# Altium PCB acqboard.PcbDoc (part 2 of 5)
Units mil, origin at the board's own origin, x right, y up, seen from the top; angles counter-clockwise.
Board outline 7000 x 5250 mil, 4 copper layers (Top Layer, Internal Plane 1, Internal Plane 2, Bottom Layer); 629 components, 384 nets, 2086 pads, 785 vias.
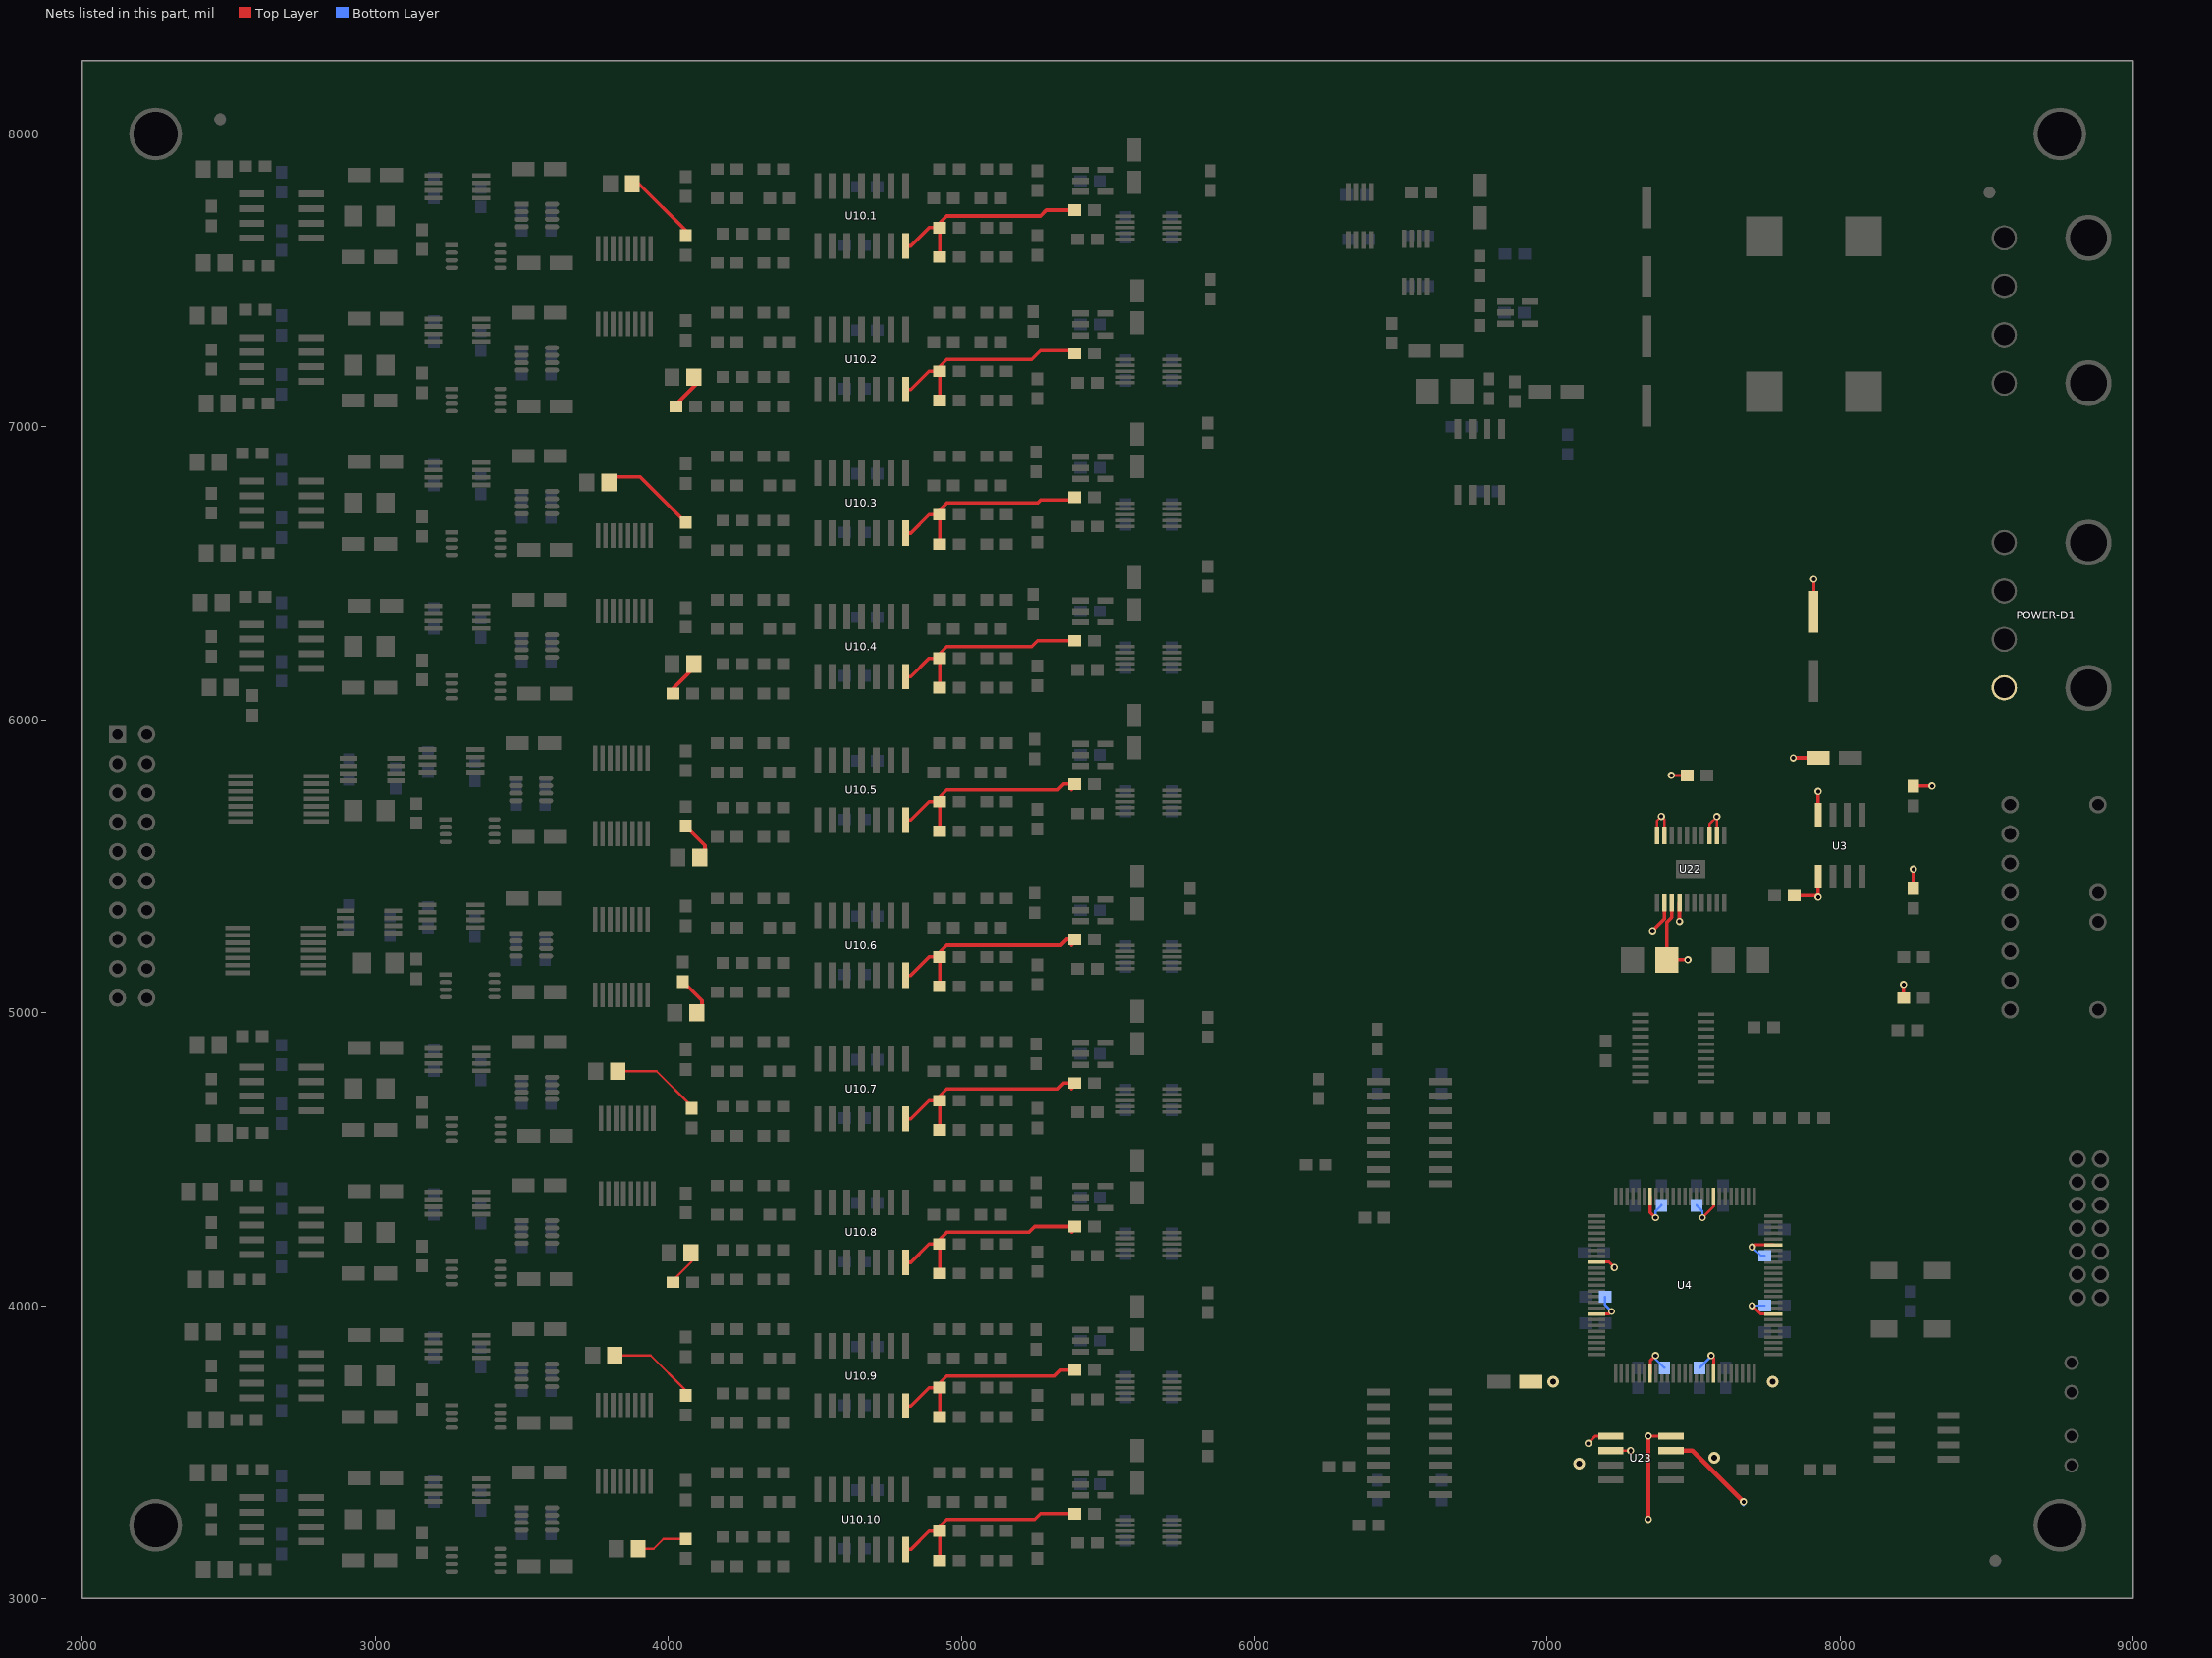
[diagram p4: the nets of this part, all layers, seen from the top]

## Components (designator, comment, footprint, x,y, rotation, side; value= is the part's Value field where it differs from the comment) (continued)
R50.8 "" 0603 2590,3100 r180 top (schematic designator R50)
U1.1 "AD8605RT" SOT-5 5450,7840 r0 top (schematic designator U1)
U1.2 "AD8605RT" SOT-5 5450,7350 r0 top (schematic designator U1)
U1.3 "AD8605RT" SOT-5 5450,6860 r0 top (schematic designator U1)
U1.4 "AD8605RT" SOT-5 5450,6370 r0 top (schematic designator U1)
U1.5 "AD8605RT" SOT-5 5450,5880 r0 top (schematic designator U1)
U1.6 "AD8605RT" SOT-5 5450,5350 r0 top (schematic designator U1)
U1.7 "AD8605RT" SOT-5 5450,4860 r0 top (schematic designator U1)
U1.8 "AD8605RT" SOT-5 5450,4370 r0 top (schematic designator U1)
U1.9 "AD8605RT" SOT-5 5450,3880 r0 top (schematic designator U1)
U1.10 "AD8605RT" SOT-5 5450,3390 r0 top (schematic designator U1)
U2.1 "AD7685BRM" "AD RM-10" 5640,7680 r270 top (schematic designator U2)
U2.2 "AD7685BRM" "AD RM-10" 5640,7190 r270 top (schematic designator U2)
U2.3 "AD7685BRM" "AD RM-10" 5640,6700 r270 top (schematic designator U2)
U2.4 "AD7685BRM" "AD RM-10" 5640,6210 r270 top (schematic designator U2)
U2.5 "AD7685BRM" "AD RM-10" 5640,5720 r270 top (schematic designator U2)
U2.6 "AD7685BRM" "AD RM-10" 5640,5190 r270 top (schematic designator U2)
U2.7 "AD7685BRM" "AD RM-10" 5640,4700 r270 top (schematic designator U2)
U2.8 "AD7685BRM" "AD RM-10" 5640,4210 r270 top (schematic designator U2)
U2.9 "AD7685BRM" "AD RM-10" 5640,3720 r270 top (schematic designator U2)
U2.10 "AD7685BRM" "AD RM-10" 5640,3230 r270 top (schematic designator U2)
U3 "SN75451BD" SO-G8/E2.5 8000,5570 r0 top
U4 "XC3S50-4VQ100C Spartan-3" F-QFP14X14-G100/N 7470,4070 r90 top
U5 "25LC320/SN" SO-G8/E2.9 8260,3550 r270 top
U6 "XCF01S" TSSO6x6-G20/X.3 7430,4880 r90 top
U7.1 "AD8510ARM" TSSO3X5-G8/X.4 3280,7820 r270 top (schematic designator U7)
U7.2 "AD8510ARM" TSSO3X5-G8/X.4 3280,7330 r270 top (schematic designator U7)
U7.3 "AD8510ARM" TSSO3X5-G8/X.4 3280,6840 r270 top (schematic designator U7)
U7.4 "AD8510ARM" TSSO3X5-G8/X.4 3280,6350 r270 top (schematic designator U7)
U7.5 "AD8510ARM" TSSO3X5-G8/X.4 3260,5860 r270 top (schematic designator U7)
U7.6 "AD8510ARM" TSSO3X5-G8/X.4 3260,5330 r270 top (schematic designator U7)
U7.7 "AD8510ARM" TSSO3X5-G8/X.4 3280,4840 r270 top (schematic designator U7)
U7.8 "AD8510ARM" TSSO3X5-G8/X.4 3280,4350 r270 top (schematic designator U7)
U7.9 "AD8510ARM" TSSO3X5-G8/X.4 3280,3860 r270 top (schematic designator U7)
U7.10 "AD8510ARM" TSSO3X5-G8/X.4 3280,3370 r270 top (schematic designator U7)
U8.1 "LTC6910-1" TSOT-23-8 3500,7760 r0 top (schematic designator U8)
U8.2 "LTC6910-1" TSOT-23-8 3500,7270 r0 top (schematic designator U8)
U8.3 "LTC6910-1" TSOT-23-8 3500,6780 r0 top (schematic designator U8)
U8.4 "LTC6910-1" TSOT-23-8 3500,6290 r0 top (schematic designator U8)
U8.5 "LTC6910-1" TSOT-23-8 3480,5800 r0 top (schematic designator U8)
U8.6 "LTC6910-1" TSOT-23-8 3480,5270 r0 top (schematic designator U8)
U8.7 "LTC6910-1" TSOT-23-8 3500,4780 r0 top (schematic designator U8)
U8.8 "LTC6910-1" TSOT-23-8 3500,4290 r0 top (schematic designator U8)
U8.9 "LTC6910-1" TSOT-23-8 3500,3800 r0 top (schematic designator U8)
U8.10 "LTC6910-1" TSOT-23-8 3500,3310 r0 top (schematic designator U8)
U9.1 "ADG619BRM" MSOP8 3260,7620 r0 top (schematic designator U9)
U9.2 "ADG619BRM" MSOP8 3260,7130 r0 top (schematic designator U9)
U9.3 "ADG619BRM" MSOP8 3260,6640 r0 top (schematic designator U9)
U9.4 "ADG619BRM" MSOP8 3260,6150 r0 top (schematic designator U9)
U9.5 "ADG619BRM" MSOP8 3240,5660 r0 top (schematic designator U9)
U9.6 "ADG619BRM" MSOP8 3240,5130 r0 top (schematic designator U9)
U9.7 "ADG619BRM" MSOP8 3260,4640 r0 top (schematic designator U9)
U9.8 "ADG619BRM" MSOP8 3260,4150 r0 top (schematic designator U9)
U9.9 "ADG619BRM" MSOP8 3260,3660 r0 top (schematic designator U9)
U9.10 "ADG619BRM" MSOP8 3260,3170 r0 top (schematic designator U9)
U10.1 "AD8513 AR" SO-G14 4660,7720 r0 top (schematic designator U10)
U10.2 "AD8513 AR" SO-G14 4660,7230 r0 top (schematic designator U10)
U10.3 "AD8513 AR" SO-G14 4660,6740 r0 top (schematic designator U10)
U10.4 "AD8513 AR" SO-G14 4660,6250 r0 top (schematic designator U10)
U10.5 "AD8513 AR" SO-G14 4660,5760 r0 top (schematic designator U10)
U10.6 "AD8513 AR" SO-G14 4660,5230 r0 top (schematic designator U10)
U10.7 "AD8513 AR" SO-G14 4660,4740 r0 top (schematic designator U10)
U10.8 "AD8513 AR" SO-G14 4660,4250 r0 top (schematic designator U10)
U10.9 "AD8513 AR" SO-G14 4660,3760 r0 top (schematic designator U10)
U10.10 "AD8513 AR" SO-G14 4660,3270 r0 top (schematic designator U10)
u11 "ADG604YRU" SSO-G14/X.4 2670,5730 r90 top (schematic designator U11)
U12.1 "AD8221AR" SO-G8 2680,7720 r270 top (schematic designator U12)
U12.2 "AD8221AR" SO-G8 2680,7230 r270 top (schematic designator U12)
U12.3 "AD8221AR" SO-G8 2680,6740 r270 top (schematic designator U12)
U12.4 "AD8221AR" SO-G8 2680,6250 r270 top (schematic designator U12)
U12.5 "AD8221AR" SO-G8 2680,4740 r270 top (schematic designator U12)
U12.6 "AD8221AR" SO-G8 2680,4250 r270 top (schematic designator U12)
U12.7 "AD8221AR" SO-G8 2680,3760 r270 top (schematic designator U12)
U12.8 "AD8221AR" SO-G8 2680,3270 r270 top (schematic designator U12)
U13 "AD8605RT" SOT-5 6900,7390 r0 top
U14 "IL715-3" SO-G16/D10 6530,3530 r90 top
U15 "IL716-3" SO-G16/D10 6530,4590 r270 top
U16 "SN74LV595APWR" SSO-G16/X.4 3850,7480 r0 top
U17 "SN74LV595APWR" SSO-G16/X.4 3860,4510 r0 top
U18 "SN74LV595APWR" SSO-G16/X.4 3850,6500 r0 top
U19 "SN74LV595APWR" SSO-G16/X.4 3850,3530 r0 top
U20 "SN74LV595APWR" SSO-G16/X.4 3840,5740 r0 top
U21 "SN74LV595APWR" SSO-G16/X.4 3840,5190 r0 top
U22 "TPS70245PWP" "PWP POWERPAD -20" 7490,5490 r270 top
U23 "TPS77525D" SO-G8 7320,3480 r90 top
U24 "AD8510ARM" TSSO3X5-G8/X.4 2990,5830 r270 top
U25 "AD8510ARM" TSSO3X5-G8/X.4 2980,5310 r270 top
U26 "OP1177ARM" TSSO3X5-G8/X.4 6550,7560 r0 top
u27 "ADG604YRU" SSO-G14/X.4 2660,5213 r90 top
U28 "LM4140CCM-4.1" SO-G8/D5 6770,6880 r0 top
U29 "AD8510ARM" TSSO3X5-G8/X.4 6360,7720 r0 top

## Footprints (in the part's own frame and the unit in brackets; to place one, negate y for a bottom-side part, rotate by r counter-clockwise, add the part's x,y. Pads: shape width x height; smd on the part's side, far side on the other; paste and mask are expansions set on the pad)
0603 [mm] "Standard-sized 0603 Passive"
  rect 1.1x1 smd: 1(-0.85,0) 2(0.85,0)
  silkscreen extent -1.7,-0.4 -1.7,0.4
0805 [mm] "Standard-sized 0805 Passive"
  rect 1.3x1.5 smd: 1(-0.95,0) 2(0.95,0)
  silkscreen extent -1.9,-0.65 -1.9,0.65
1206 [mm] "Standard-sized 1206 Passive"
  rect 1.6x1.8 smd: 1(-1.4,0) 2(1.4,0)
  silkscreen extent -2.53,-0.65 -2.53,0.65
3216 [mm] "Standard-Sized 3216 Polarized Leadless Cap"
  rect 2x1.2 smd: 1(-1.4,0) 2(1.4,0)
  silkscreen extent -2.79,-0.9 1.7,0.9
3528 [mm] "Standard-Sized 3528 Polarized Leadless Cap"
  rect 2x2.2 smd: 1(-1.5,0) 2(1.5,0)
  silkscreen extent -2.79,-1.52 1.65,1.52
"AD RM-10" [mm] "Shrink Small Outline; 10 Leads; Body Width 3 mm; Pitch 0.5 mm"
  rect 0.3x1.6 smd: 1(-1,-2.05) 2(-0.5,-2.05) 3(0,-2.05) 4(0.5,-2.05) 5(1,-2.05) 6(1,2.05) 7(0.5,2.05) 8(0,2.05) 9(-0.5,2.05) 10(-1,2.05)
  silkscreen extent -1.82,-2.17 1.58,0.85
CC1608-0603 [mm] "Chip Capacitor; Body 1.6 x 0.8 mm (LxW typ)"
  rect 1.1x1 smd: 1(-0.85,0) 2(0.85,0)
  silkscreen extent -1.7,-0.4 -1.7,0.4
F-QFP14X14-G100/N [mm]
  rect 1.55x0.3 smd: 1(-7.675,6) 2(-7.675,5.5) 3(-7.675,5) 4(-7.675,4.5) 5(-7.675,4) 6(-7.675,3.5) 7(-7.675,3) 8(-7.675,2.5) 9(-7.675,2) 10(-7.675,1.5) 11(-7.675,1) 12(-7.675,0.5) 13(-7.675,0) 14(-7.675,-0.5) 15(-7.675,-1) 16(-7.675,-1.5) 17(-7.675,-2) 18(-7.675,-2.5) 19(-7.675,-3) 20(-7.675,-3.5) 21(-7.675,-4) 22(-7.675,-4.5) 23(-7.675,-5) 24(-7.675,-5.5) 25(-7.675,-6) 51(7.675,-6) 52(7.675,-5.5) 53(7.675,-5) 54(7.675,-4.5) 55(7.675,-4) 56(7.675,-3.5) 57(7.675,-3) 58(7.675,-2.5) 59(7.675,-2) 60(7.675,-1.5) 61(7.675,-1) 62(7.675,-0.5) 63(7.675,0) 64(7.675,0.5) 65(7.675,1) 66(7.675,1.5) 67(7.675,2) 68(7.675,2.5) 69(7.675,3) 70(7.675,3.5) 71(7.675,4) 72(7.675,4.5) 73(7.675,5) 74(7.675,5.5) 75(7.675,6)
  rect 0.3x1.55 smd: 26(-6,-7.675) 27(-5.5,-7.675) 28(-5,-7.675) 29(-4.5,-7.675) 30(-4,-7.675) 31(-3.5,-7.675) 32(-3,-7.675) 33(-2.5,-7.675) 34(-2,-7.675) 35(-1.5,-7.675) 36(-1,-7.675) 37(-0.5,-7.675) 38(0,-7.675) 39(0.5,-7.675) 40(1,-7.675) 41(1.5,-7.675) 42(2,-7.675) 43(2.5,-7.675) 44(3,-7.675) 45(3.5,-7.675) 46(4,-7.675) 47(4.5,-7.675) 48(5,-7.675) 49(5.5,-7.675) 50(6,-7.675) 76(6,7.675) 77(5.5,7.675) 78(5,7.675) 79(4.5,7.675) 80(4,7.675) 81(3.5,7.675) 82(3,7.675) 83(2.5,7.675) 84(2,7.675) 85(1.5,7.675) 86(1,7.675) 87(0.5,7.675) 88(0,7.675) 89(-0.5,7.675) 90(-1,7.675) 91(-1.5,7.675) 92(-2,7.675) 93(-2.5,7.675) 94(-3,7.675) 95(-3.5,7.675) 96(-4,7.675) 97(-4.5,7.675) 98(-5,7.675) 99(-5.5,7.675) 100(-6,7.675)
  silkscreen extent -7.8,-6.5 6.5,6.82
FIDUCIAL [mil] "Fiducial footprint as recommended by PCBpro"
  round 40 smd paste-20 mask+30: 0(0,0)
HDR2x7-2mm [mm]
  round 1.5 hole 1: 1(0,0) 2(-2,0) 3(0,2) 4(-2,2) 5(0,4) 6(-2,4) 7(0,6) 8(-2,6) 9(0,8) 10(-2,8) 11(0,10) 12(-2,10) 13(0,12) 14(-2,12)
  silkscreen extent -3.5,-1.5 1.5,13.5
HDR2X10 [mm]
  rect 1.5x1.5 hole 0.9: 1(0,0)
  round 1.5 hole 0.9: 2(0,2.54) 3(2.54,0) 4(2.54,2.54) 5(5.08,0) 6(5.08,2.54) 7(7.62,0) 8(7.62,2.54) 9(10.16,0) 10(10.16,2.54) 11(12.7,0) 12(12.7,2.54) 13(15.24,0) 14(15.24,2.54) 15(17.78,0) 16(17.78,2.54) 17(20.32,0) 18(20.32,2.54) 19(22.86,0) 20(22.86,2.54)
  silkscreen extent -1.27,-1.27 24.13,3.81
HPVL [mil]
  round 60 hole 40: 1(150,0) 2(50,0) 3(-50,0) 4(-150,0) 5(-150,-300) 8(150,-300)
  silkscreen extent -200,-370 200,100
"LUMEX DUAL RT-ANG LED" [mil] "Lumex Dual Right-angle LED holder for part SSF-LXH2100XX"
  round 50 hole 35: 1(-175.2,0) 2(-75,0) 3(75,0) 4(175.2,0)
  silkscreen extent -246,-217 246,150
MJ4RTHR [mm]
  round 4 hole 3.2: 0(-8.4,-7.3) 0(4.2,-7.3)
  round 2.2 hole 1.8: 1(4.2,0) 2(0,0) 3(-4.2,0) 4(-8.4,0)
  silkscreen extent -11.1,-14.2 6.9,-1.9
MSOP8 [mm]
  rect 1.04x0.38 smd: 1(0,0)
  oval 1.04x0.38 smd: 2(0,-0.65) 3(0,-1.3) 4(0,-1.95) 5(4.24,-1.95) 6(4.24,-1.3) 7(4.24,-0.65) 8(4.24,0)
  silkscreen extent 1.25,-2.28 2.99,0.33
PanasonicE [mm]
  rect 3.6x0.8 smd: 1(3,0) 2(-3,0)
  silkscreen extent -4.6,-4.1 4.6,4.2
"PWP POWERPAD -20" [mil]
  rect 60x15 smd: 1(-115,115) 2(-115,89.4) 3(-115,63.8) 4(-115,38.2) 5(-115,12.6) 6(-115,-13) 7(-115,-38.6) 8(-115,-64.2) 9(-115,-89.8) 10(-115,-115.4) 11(115,-115.4) 12(115,-89.8) 13(115,-64.2) 14(115,-38.6) 15(115,-13) 16(115,12.6) 17(115,38.2) 18(115,63.8) 19(115,89.4) 20(115,115)
  rect 62x101 smd paste+0 mask+0: P1(0,0)
  silkscreen extent -75,-140 75,140
SG636PCE [mm]
  rect 2.3x1.5 smd: 1(0,0) 4(0,-5.08) 5(4.6,-5.08) 8(4.6,0)
  silkscreen extent -1.96,-8.64 4.57,3.05
SO-G8 [mm]
  rect 0.6x2.2 smd: 1(-1.905,-2.6) 2(-0.635,-2.6) 3(0.635,-2.6) 4(1.905,-2.6) 5(1.905,2.6) 6(0.635,2.6) 7(-0.635,2.6) 8(-1.905,2.6)
  silkscreen extent -2.88,-2.72 2.5,1.1
SO-G8/D5 [mm] "Small Outline; 8 Leads; Body Width 3.9 mm; Pitch 1.27 mm"
  rect 0.6x1.7 smd: 1(-1.905,-2.85) 2(-0.635,-2.85) 3(0.635,-2.85) 4(1.905,-2.85) 5(1.905,2.85) 6(0.635,2.85) 7(-0.635,2.85) 8(-1.905,2.85)
  silkscreen extent -2.88,-2.97 2.5,1.6
SO-G8/E2.5 [mm]
  rect 0.6x2.05 smd: 1(-1.905,-2.675) 2(-0.635,-2.675) 3(0.635,-2.675) 4(1.905,-2.675) 5(1.905,2.675) 6(0.635,2.675) 7(-0.635,2.675) 8(-1.905,2.675)
  silkscreen extent -2.88,-2.8 2.5,1.25
SO-G8/E2.9 [mm]
  rect 0.6x1.85 smd: 1(-1.905,-2.775) 2(-0.635,-2.775) 3(0.635,-2.775) 4(1.905,-2.775) 5(1.905,2.775) 6(0.635,2.775) 7(-0.635,2.775) 8(-1.905,2.775)
  silkscreen extent -2.88,-2.9 2.5,1.45
SO-G14 [mm]
  rect 0.6x2.2 smd: 1(-3.81,-2.6) 2(-2.54,-2.6) 3(-1.27,-2.6) 4(0,-2.6) 5(1.27,-2.6) 6(2.54,-2.6) 7(3.81,-2.6) 8(3.81,2.6) 9(2.54,2.6) 10(1.27,2.6) 11(0,2.6) 12(-1.27,2.6) 13(-2.54,2.6) 14(-3.81,2.6)
  silkscreen extent -4.78,-2.72 4.38,1.1
SO-G16/D10 [mm]
  rect 0.6x2.05 smd: 1(-4.445,-2.675) 2(-3.175,-2.675) 3(-1.905,-2.675) 4(-0.635,-2.675) 5(0.635,-2.675) 6(1.905,-2.675) 7(3.175,-2.675) 8(4.445,-2.675) 9(4.445,2.675) 10(3.175,2.675) 11(1.905,2.675) 12(0.635,2.675) 13(-0.635,2.675) 14(-1.905,2.675) 15(-3.175,2.675) 16(-4.445,2.675)
  silkscreen extent -5.42,-2.8 5,1.25
SOT-5 [mm]
  rect 1.45x0.55 smd: 1(-1.075,0.95) 2(-1.075,0) 3(-1.075,-0.95) 4(1.075,-0.95) 5(1.075,0.95)
  silkscreen extent -1.57,-1.55 0.9,1.75
SSO-G14/X.4 [mm]
  rect 0.4x2.15 smd: 1(-1.95,-3.275) 2(-1.3,-3.275) 3(-0.65,-3.275) 4(0,-3.275) 5(0.65,-3.275) 6(1.3,-3.275) 7(1.95,-3.275) 8(1.95,3.275) 9(1.3,3.275) 10(0.65,3.275) 11(0,3.275) 12(-0.65,3.275) 13(-1.3,3.275) 14(-1.95,3.275)
  silkscreen extent -3.25,-3.4 3.25,1.8
SSO-G16/X.4 [mm]
  rect 0.4x2.15 smd: 1(-2.275,-3.275) 2(-1.625,-3.275) 3(-0.975,-3.275) 4(-0.325,-3.275) 5(0.325,-3.275) 6(0.975,-3.275) 7(1.625,-3.275) 8(2.275,-3.275) 9(2.275,3.275) 10(1.625,3.275) 11(0.975,3.275) 12(0.325,3.275) 13(-0.325,3.275) 14(-0.975,3.275) 15(-1.625,3.275) 16(-2.275,3.275)
  silkscreen extent -3.25,-3.4 3.25,1.8
STEWARD_1SR [mil]
  rect 124x136 smd: 1(-169,0) 2(169,0)
  silkscreen extent -263,-100 263,100
TSOT-23-8 [mm]
  rect 1.22x0.43 smd: 1(0,0)
  oval 1.22x0.43 smd: 2(0,-0.65) 3(0,-1.3) 4(0,-1.95) 5(2.62,-1.95) 6(2.62,-1.3) 7(2.62,-0.65) 8(2.62,0)
  silkscreen extent 0.9,-2.35 1.75,0.25
TSSO3X5-G8/X.4 [mm]
  rect 0.4x1.55 smd: 1(-0.975,-2.075) 2(-0.325,-2.075) 3(0.325,-2.075) 4(0.975,-2.075) 5(0.975,2.075) 6(0.325,2.075) 7(-0.325,2.075) 8(-0.975,2.075)
  silkscreen extent -1.85,-2.2 1.55,0.9
TSSO6x6-G20/X.3 [mm]
  rect 0.3x1.45 smd: 1(-2.925,-2.825) 2(-2.275,-2.825) 3(-1.625,-2.825) 4(-0.975,-2.825) 5(-0.325,-2.825) 6(0.325,-2.825) 7(0.975,-2.825) 8(1.625,-2.825) 9(2.275,-2.825) 10(2.925,-2.825) 11(2.925,2.825) 12(2.275,2.825) 13(1.625,2.825) 14(0.975,2.825) 15(0.325,2.825) 16(-0.325,2.825) 17(-0.975,2.825) 18(-1.625,2.825) 19(-2.275,2.825) 20(-2.925,2.825)
  silkscreen extent -3.75,-2.95 3.3,1.7

## Part data
C1.1 C1.2 C1.3 C1.4 C1.5 C1.6 C1.7 C1.8 C1.9 C1.10 C3.1 C3.2 C3.3 C3.4 C3.5 C3.6 C3.7 C3.8 C3.9 C3.10 C4.1 C4.2 C4.3 C4.4 C4.5 C4.6 C4.7 C4.8 C4.9 C4.10 C5.1 C5.2 C5.3 C5.4 C5.5 C5.6 C5.7 C5.8 C5.9 C5.10 C6 C8 C9 C10 C12 C13 C14 C15 C16 C17 C18 C19 C20 C21 C22 C23 C24 C25 C26 C27 C28.1 C28.2 C28.3 C28.4 C28.5 C28.6 C28.7 C28.8 C28.9 C28.10 C29.1 C29.2 C29.3 C29.4 C29.5 C29.6 C29.7 C29.8 C29.9 C29.10 C30.1 C30.2 C30.3 C30.4 C30.5 C30.6 C30.7 C30.8 C30.9 C30.10 C31.1 C31.2 C31.3 C31.4 C31.5 C31.6 C31.7 C31.8 C31.9 C31.10 C32.1 C32.2 C32.3 C32.4 C32.5 C32.6 C32.7 C32.8 C32.9 C32.10 C35.1 C35.2 C35.3 C35.4 C35.5 C35.6 C35.7 C35.8 C35.9 C35.10 C36.1 C36.2 C36.3 C36.4 C36.5 C36.6 C36.7 C36.8 C36.9 C36.10 C37.1 C37.2 C37.3 C37.4 C37.5 C37.6 C37.7 C37.8 C37.9 C37.10 C38.1 C38.2 C38.3 C38.4 C38.5 C38.6 C38.7 C38.8 C38.9 C38.10 C39.1 C39.2 C39.3 C39.4 C39.5 C39.6 C39.7 C39.8 C39.9 C39.10 C40.1 C40.2 C40.3 C40.4 C40.5 C40.6 C40.7 C40.8 C40.9 C40.10 C41.1 C41.2 C41.3 C41.4 C41.5 C41.6 C41.7 C41.8 C41.9 C41.10 C42.1 C42.2 C42.3 C42.4 C42.5 C42.6 C42.7 C42.8 C42.9 C42.10 C43.1 C43.2 C43.3 C43.4 C43.5 C43.6 C43.7 C43.8 C44.1 C44.2 C44.3 C44.4 C44.5 C44.6 C44.7 C44.8 C47 C48.1 C48.2 C48.3 C48.4 C48.5 C48.6 C48.7 C48.8 C48.9 C48.10 C49 C50 C51 C52 C53 C55 C56 C57 C58 C59 C65.1 C65.2 C65.3 C65.4 C65.5 C65.6 C65.7 C65.8 C66 C71.1 C71.2 C71.3 C71.4 C71.5 C71.6 C71.7 C71.8 C71.9 C71.10 C72.1 C72.2 C72.3 C72.4 C72.5 C72.6 C72.7 C72.8 C72.9 C72.10 C73.1 C73.2 C73.3 C73.4 C73.5 C73.6 C73.7 C73.8 C74 C75 C76 C77: library part Cap, "Capacitor"
C2.1 C2.2 C2.3 C2.4 C2.5 C2.6 C2.7 C2.8 C2.9 C2.10 C45.1 C45.2 C45.3 C45.4 C45.5 C45.6 C45.7 C45.8 C46.1 C46.2 C46.3 C46.4 C46.5 C46.6 C46.7 C46.8 C69 C70: library part "Cap Pol3", "Polarized Capacitor (Surface Mount)"
C7 C54 C63 C64 C67 C68: library part "Cap Pol1", "Polarized Capacitor (Radial)"
C11 C33.1 C33.2 C33.3 C33.4 C33.5 C33.6 C33.7 C33.8 C33.9 C33.10 C34.1 C34.2 C34.3 C34.4 C34.5 C34.6 C34.7 C34.8 C34.9 C34.10 C61 C62: library part Cap2, "Capacitor"
C60: "Capacitor"
FID1 FID2 FID3 FID4 FID5 FID6: "Fiducial"
JP1: "Header, 7-Pin, Dual row"
JP2: "Header, 10-Pin, Dual row, Right Angle"
L1: library part "DUAL LED", "DUAL LED"
L2 L3: library part Inductor, "Inductor"
O1: library part HFBR-1528, "Low-cost fiber transmitter"
O2: library part SG-636PCE, "Epson CMOS/TTL Oscillator"
O3: library part HFBR-2528, "Low-cost fiber receiver"
POWER-A1 POWER-D1: library part "Header 4", "Header, 4-Pin"
R1 R2 R3 R4 R5 R6 R7 R8 R9 R10 R11 R12 R13.1 R13.2 R13.3 R13.4 R13.5 R13.6 R13.7 R13.8 R13.9 R13.10 R14.1 R14.2 R14.3 R14.4 R14.5 R14.6 R14.7 R14.8 R14.9 R14.10 R15.1 R15.2 R15.3 R15.4 R15.5 R15.6 R15.7 R15.8 R15.9 R15.10 R16.1 R16.2 R16.3 R16.4 R16.5 R16.6 R16.7 R16.8 R16.9 R16.10 R17.1 R17.2 R17.3 R17.4 R17.5 R17.6 R17.7 R17.8 R17.9 R17.10 R18.1 R18.2 R18.3 R18.4 R18.5 R18.6 R18.7 R18.8 R18.9 R18.10 R19.1 R19.2 R19.3 R19.4 R19.5 R19.6 R19.7 R19.8 R19.9 R19.10 R20.1 R20.2 R20.3 R20.4 R20.5 R20.6 R20.7 R20.8 R20.9 R20.10 R21.1 R21.2 R21.3 R21.4 R21.5 R21.6 R21.7 R21.8 R21.9 R21.10 R22.1 R22.2 R22.3 R22.4 R22.5 R22.6 R22.7 R22.8 R22.9 R22.10 R23.1 R23.2 R23.3 R23.4 R23.5 R23.6 R23.7 R23.8 R23.9 R23.10 R24.1 R24.2 R24.3 R24.4 R24.5 R24.6 R24.7 R24.8 R24.9 R24.10 R25.1 R25.2 R25.3 R25.4 R25.5 R25.6 R25.7 R25.8 R25.9 R25.10 R27 R28 R29 R30.1 R30.2 R30.3 R30.4 R30.5 R30.6 R30.7 R30.8 R30.9 R30.10 R31 R32 R33 R34 R35 R36 R37 R38 R39 R40 R41 R42 R43 R44 R45 R46 R47 R48: library part Res1, "Resistor"
R26.1 R26.2 R26.3 R26.4 R26.5 R26.6 R26.7 R26.8 R49.1 R49.2 R49.3 R49.4 R49.5 R49.6 R49.7 R49.8 R50.1 R50.2 R50.3 R50.4 R50.5 R50.6 R50.7 R50.8: library part RESISTOR, "Standard Passive Resistor"
U1.1 U1.2 U1.3 U1.4 U1.5 U1.6 U1.7 U1.8 U1.9 U1.10 U13: "Analog Devices Precision Low Noise CMOS Rail-to-Rail Input/Output Operational Amplifier"
U2.1 U2.2 U2.3 U2.4 U2.5 U2.6 U2.7 U2.8 U2.9 U2.10: library part AD7685, "AD 16-bit 250 kSPS ADC"
U3: "Dual Peripheral Driver"
U4: library part XC3S50-4VQ100C, "Xilinx Spartan-3 VQ100"
U5: library part 25LC320-SOIC, "32k SPI Bus Serial EEPROM"
U6: "Xilinx Platform Flash"
U7.1 U7.2 U7.3 U7.4 U7.5 U7.6 U7.7 U7.8 U7.9 U7.10 U24 U25 U26 U29: library part OP1177, "Precision Low Noise, Low Input Bias Current Operational Amplifier"
U8.1 U8.2 U8.3 U8.4 U8.5 U8.6 U8.7 U8.8 U8.9 U8.10: "LTI Digitally Controlled Programmabe Gain Amp"
U9.1 U9.2 U9.3 U9.4 U9.5 U9.6 U9.7 U9.8 U9.9 U9.10: library part ADG619, "Low RON SPDT Switch (s2 normally on)"
U10.1 U10.2 U10.3 U10.4 U10.5 U10.6 U10.7 U10.8 U10.9 U10.10: library part AD8513ARU, "low-noise JFET quad OA"
u11 u27: library part ADG604, "1 pC Charge Injection 100pA leakage CMOS 4-channel mux"
U12.1 U12.2 U12.3 U12.4 U12.5 U12.6 U12.7 U12.8: library part AD8221, "AD8221 Precision Instrumentation Amplifier"
U14 U15: "High speed digital coupler"
U16 U17 U18 U19 U20 U21: "8-bit shift register with 3-state output"
U22: "TI dual-output low dropout voltage regulators"
U23: "Fast-transient-response 500 mA low-dropout voltage regulator"
U28: library part LM4140CCM, "National 4.096V Low-noise Voltage Reference"

## Free pads (board coordinates)
  round 180 hole 150 unplated: 1(2250,3250) 1(2250,8000) 1(8750,3250) 1(8750,8000)

## Via types
v1: diameter 25, hole 13.5, Top Layer to Bottom Layer, 768 vias
v2: diameter 40, hole 20, Top Layer to Bottom Layer, 13 vias
v3: diameter 40, hole 25, Top Layer to Bottom Layer, 4 vias

## Nets (pads, with @x,y where several pads share a name; then routed paths per layer and width w, separated by ;. In a path a pad name is that pad's centre, name@x,y a point inside that pad or via, vN(x,y) a via of type N, cw(c..) or ccw(c..) an arc to the next point about the centre after c; other vN are vias at no path point)
+1.2VCC: C20.1 C21.1 C22.1 C23.1 C68.1 U4.18 U4.45 U4.69 U4.93 U22.12 U22.13 U22.14 | length 947.6
  Top Layer w10: U4.93@7167.83,3971.57 7211.57,3971.57 v1(7220,3980) ; v1(7560,3830) 7568.43,3821.57 U4.18@7568.43,3767.83 ; v1(7700,4200) 7707.8,4207.8 U4.45@7772.17,4207.8
  Top Layer w12: U4.69@7351.89,4372.17 7351.89,4318.11 v1(7370,4300) ; v1(7360,5280) 7400.2,5320.2 U22.12@7400.2,5375 ; U22.13@7425.8,5375 7425.8,5325.8 7409.06,5309.06 C68.1@7409.06,5180 v1(7480,5180) ; v1(7451.4,5311.4) U22.14@7451.4,5375
  Bottom Layer w8: C22.1@7197.78,4030 7197.78,4002.22 v1(7220,3980) ; v1(7370,4300) 7370,4322.22 C23.1@7390,4342.22 ; C21.1@7520,3787.78 7560,3827.78 v1(7560,3830) ; v1(7700,4200) 7730,4170 C20.1@7742.22,4170
+2.5VCC: C24.1 C25.1 C26.1 C62.1 U4.7 U4.33 U4.58 U4.84 U23.5 U23.6 | length 621.4
  Top Layer w10: v1(7140,3530) 7165,3555 U23.5@7217.64,3555 ; U4.84@7167.83,4148.74 7211.26,4148.74 v1(7230,4130) ; U23.6@7217.64,3505 v1(7285,3505) ; U4.7@7351.89,3767.83 7351.89,3811.89 v1(7370,3830) ; v1(7530,4300) 7568.43,4338.43 U4.58@7568.43,4372.17 ; v1(7700,4000) 7728.43,3971.57 U4.33@7772.17,3971.57
  Bottom Layer w8: v1(7285,3505) v1@7290,3510 ; v1(7370,3830) 7370,3817.78 C26.1@7400,3787.78 ; C24.1@7510,4342.22 7530,4322.22 v1(7530,4300) ; v1(7700,4000) C25.1@7742.22,4000
  other v2: 7110,3460 7570,3480 7020,3740 7770,3740
+5VCC: C8.1 C11.1 C53.1 C61.1 POWER-D1.4 R1.2 R2.2 R4.1 U3.1 U3.8 U22.2 U22.3 U22.9 U22.10 U23.3 U23.4 | length 1651.6
  Top Layer w8: U22.10@7374.6,5605 7374.6,5654.6 v1(7390,5670) 7400.2,5659.8 U22.9@7400.2,5605 ; U22.3@7553.8,5605 7553.8,5643.8 v1(7579.4,5669.4) U22.2@7579.4,5605
  Top Layer w10: v1(7345,3555) U23.4@7422.36,3555 ; v1(7424,5810) C53.1@7478.54,5810 ; C61.1@7910,6368.11 v1(7910,6480)
  Top Layer w12: v1(7840,5870) C11.1@7930,5870 ; C8.1@7843.46,5400 v1@7920,5400 ; v1(7925,5395) U3.1@7925,5464.69 ; U3.8@7925,5675.31 v1(7925,5755) ; R4.1@8216.54,5050 v1(8216.54,5096.54) ; R2.2@8250,5423.46 v1(8250,5490) ; R1.2@8250,5773.46 v1(8313.46,5773.46)
  Top Layer w16: v1(7345,3271) v1(7345,3555) ; U23.3@7422.36,3505 7495,3505 v1(7670,3330)
  Bottom Layer w8: v1@7340,3560 v1(7345,3555) ; v1@7920,5390 v1(7925,5395) ; v1@7920,5760 v1(7925,5755)
  Bottom Layer w12: v1@7670,3320 v1(7670,3330)
AAIN1: C48.1.1 R16.1.1 | length 242.8
  Top Layer w12: C48.1.1@3900,7830 4060,7670 R16.1.1@4060,7653.46
AAIN2: C48.2.1 R16.2.1 | length 119
  Top Layer w12: R16.2.1@4030,7080 4100,7150 C48.2.1@4100,7170
AAIN3: C48.3.1 R16.3.1 | length 314.8
  Top Layer w12: C48.3.1@3810,6830 3903.46,6830 3923.46,6810 3928.62,6804.85 R16.3.1@4060,6673.46
AAIN4: C48.4.1 R16.4.1 | length 139.7
  Top Layer w12: R16.4.1@4016.54,6090 4016.54,6106.54 4100,6190 C48.4.1@4105.12,6190
AAIN5: C48.5.1 R16.5.1 | length 124.3
  Top Layer w12: R16.5.1@4066.54,5630 4125.12,5571.42 C48.5.1@4125.12,5530
AAIN6: C48.6.1 R16.6.1 | length 133.5
  Top Layer w12: R16.6.1@4050,5106.54 4115.12,5041.42 C48.6.1@4115.12,5000
AAIN7: C48.7.1 R16.7.1 | length 284.6
  Top Layer w8: C48.7.1@3845.12,4800 3960,4800 R16.7.1@4080,4680
AAIN8: C48.8.1 R16.8.1 | length 136.3
  Top Layer w8: R16.8.1@4016.54,4080 4016.54,4086.54 4080,4150 C48.8.1@4080,4190
AAIN9: C48.9.1 R16.9.1 | length 274.6
  Top Layer w8: C48.9.1@3835.12,3830 3940,3830 R16.9.1@4060,3710
AAIN10: C48.10.1 R16.10.1 | length 151.5
  Top Layer w8: C48.10.1@3915.12,3170 3950,3170 3983.46,3203.46 4043.46,3203.46 R16.10.1@4050,3210
AAOUT1: C40.1.1 R21.1.1 R30.1.1 U10.1.7 | length 736.9
  Top Layer w12: U10.1.7@4810,7617.64 4827.64,7617.64 4890,7680 R21.1.1@4926.54,7680 ; C40.1.1@4926.54,7580 4926.54,7696.54 4950,7720 5270,7720 5290,7740 R30.1.1@5386.54,7740
AAOUT2: C40.2.1 R21.2.1 R30.2.1 U10.2.7 | length 735.2
  Top Layer w12: U10.2.7@4820,7127.64 4827.64,7127.64 4890,7190 R21.2.1@4926.54,7190 ; C40.2.1@4926.54,7090 4926.54,7206.54 4950,7230 5240,7230 5270,7260 5376.54,7260 R30.2.1@5386.54,7250
AAOUT3: C40.3.1 R21.3.1 R30.3.1 U10.3.7 | length 736.9
  Top Layer w12: U10.3.7@4810,6637.64 4827.64,6637.64 4890,6700 R21.3.1@4926.54,6700 ; C40.3.1@4926.54,6600 4926.54,6716.54 4950,6740 5260,6740 5270,6750 5376.54,6750 R30.3.1@5386.54,6760
AAOUT4: C40.4.1 R21.4.1 R30.4.1 U10.4.7 | length 736.9
  Top Layer w12: U10.4.7@4810,6147.64 4827.64,6147.64 4890,6210 R21.4.1@4926.54,6210 ; C40.4.1@4926.54,6110 4926.54,6226.54 4950,6250 5240,6250 5260,6270 R30.4.1@5386.54,6270
AAOUT5: C40.5.1 R21.5.1 R30.5.1 U10.5.7 | length 765.2
  Top Layer w12: U10.5.7@4810,5657.64 4827.64,5657.64 4890,5720 R21.5.1@4926.54,5720 ; C40.5.1@4926.54,5620 4926.54,5736.54 4950,5760 5330,5760 5350,5780 R30.5.1@5386.54,5780 ; 5376.54,5760 R30.5.1@5396.54,5780
AAOUT6: C40.6.1 R21.6.1 R30.6.1 U10.6.7 | length 765.2
  Top Layer w12: U10.6.7@4810,5127.64 4827.64,5127.64 4890,5190 R21.6.1@4926.54,5190 ; C40.6.1@4926.54,5090 4926.54,5206.54 4950,5230 5340,5230 5360,5250 R30.6.1@5386.54,5250 ; 5376.54,5230 R30.6.1@5396.54,5250
AAOUT7: C40.7.1 R21.7.1 R30.7.1 U10.7.7 | length 765.2
  Top Layer w12: U10.7.7@4810,4637.64 4827.64,4637.64 4890,4700 R21.7.1@4926.54,4700 ; C40.7.1@4926.54,4600 4926.54,4716.54 4950,4740 5330,4740 5350,4760 R30.7.1@5386.54,4760 ; 5376.54,4740 R30.7.1@5396.54,4760
AAOUT8: C40.8.1 R21.8.1 R30.8.1 U10.8.7 | length 765.2
  Top Layer w12: U10.8.7@4810,4147.64 4827.64,4147.64 4890,4210 R21.8.1@4926.54,4210 ; C40.8.1@4926.54,4110 4926.54,4226.54 4950,4250 5230,4250 5250,4270 R30.8.1@5386.54,4270 ; 5376.54,4250 R30.8.1@5396.54,4270
AAOUT9: C40.9.1 R21.9.1 R30.9.1 U10.9.7 | length 736.9
  Top Layer w12: U10.9.7@4810,3657.64 4827.64,3657.64 4890,3720 R21.9.1@4926.54,3720 ; C40.9.1@4926.54,3620 4926.54,3736.54 4950,3760 5320,3760 5340,3780 R30.9.1@5386.54,3780
AAOUT10: C40.10.1 R21.10.1 R30.10.1 U10.10.7 | length 736.9
  Top Layer w12: U10.10.7@4810,3167.64 4827.64,3167.64 4890,3230 R21.10.1@4926.54,3230 ; C40.10.1@4926.54,3130 4926.54,3246.54 4950,3270 5250,3270 5270,3290 R30.10.1@5386.54,3290

## Text inside footprints (layer, text, board x,y; h text height)
JP2: Top Overlay "20" at 2200,4990 h50 r270; Top Overlay "19" at 2100,4990 h50 r270; Top Overlay "1" at 2100,6050 h50 r270; Top Overlay "2" at 2200,6050 h50 r270